# Altium PCB Altium_Sensor_CO2_Rev1.PcbDoc
Units mil, origin at the board's own origin, x right, y up, seen from the top; angles counter-clockwise.
Board outline 472.44 x 440.94 mil, 4 copper layers (Top Layer 1, MidLayer1, MidLayer2, Bottom Layer 1), stack 61.216 mil thick; 5 components, 4 nets, 25 pads, 9 vias.
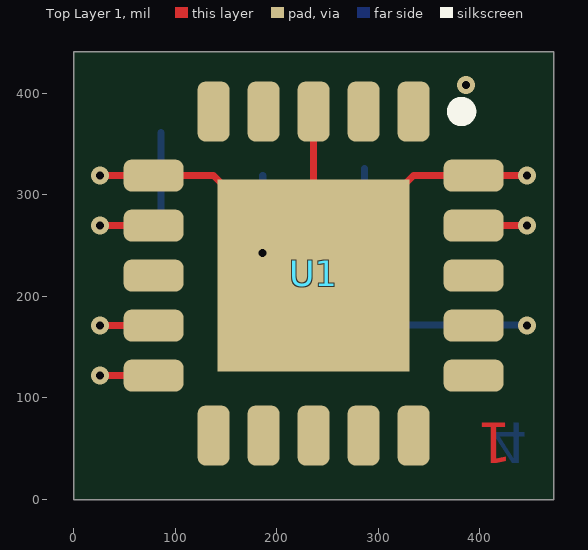
[diagram p0: Top Layer 1 view]
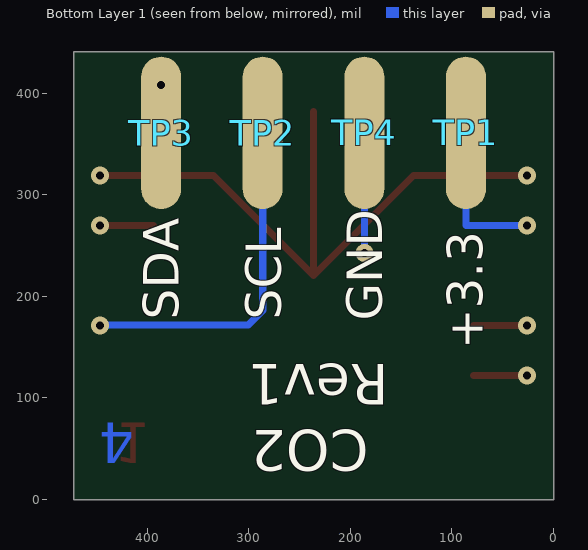
[diagram p1: Bottom Layer 1 view, seen from below]
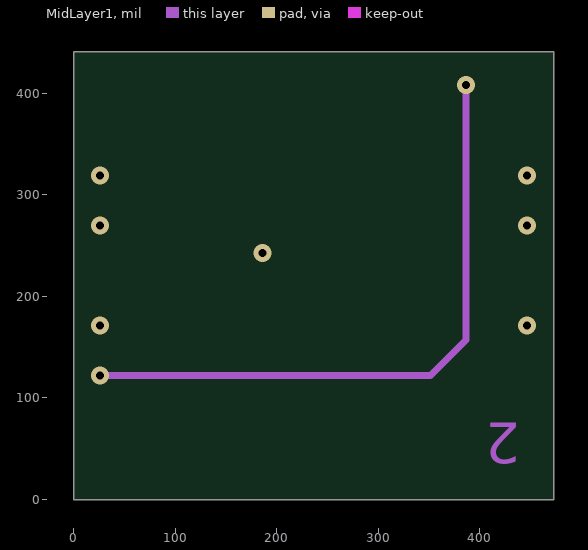
[diagram p2: MidLayer1]
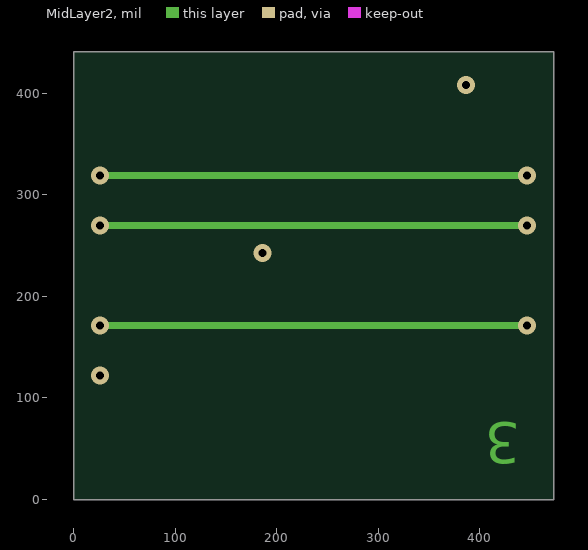
[diagram p3: MidLayer2]

## Layer stack, top to bottom
Top Solder: solder mask 0.4, Solder Resist, Dk 3.5
Top Layer 1: signal copper 1.378
Dielectric 4: prepreg 2.8, PP-006, Dk 4.1
MidLayer1: signal copper 1.4
Dielectric 1: dielectric 50.06, FR-4, Dk 4.8
MidLayer2: signal copper 1.4
Dielectric 5: prepreg 2.8, PP-006, Dk 4.1
Bottom Layer 1: signal copper 1.378
Bottom Solder: solder mask 0.4, Solder Resist, Dk 3.5

## Board outline
0,0 0,440.94 472.44,440.94 472.44,0

## Design rules (kind name [scope] priority, off if disabled: settings)
Clearance Clearance_X1 [InComponent('X1')] p1: gap=5 ignorepadtopadclearanceinfootprint=FALSE
Clearance Clearance_Q1 [InComponent('Q1')] p2: gap=7 ignorepadtopadclearanceinfootprint=FALSE
Clearance Clearance_U1 [All vs InComponent('U1')] p3: gap=7 ignorepadtopadclearanceinfootprint=FALSE
Clearance Clearance_J2 [InComponent('J2')] p4: gap=7 ignorepadtopadclearanceinfootprint=FALSE
Clearance Clearance_U2 [All vs InComponent('U2')] p5: gap=5 ignorepadtopadclearanceinfootprint=FALSE
Clearance [All] p6: gap=8 ignorepadtopadclearanceinfootprint=FALSE
HoleSize [All] p1: absolutevalues=TRUE maxlimit=200 minlimit=1 maxpercent=80.000 minpercent=20.000
MinimumSolderMaskSliver MinimumSolderMaskSliver_X1 [All vs InComponent('X1')] p1: minsoldermaskwidth=0.6
MinimumSolderMaskSliver [All] p2: minsoldermaskwidth=0.6
PlaneConnect [All] p1: planeconnectstyle=Direct reliefexpansion=20 reliefentries=4 reliefconductorwidth=10 reliefairgap=10
PolygonConnect PolygonConnect_Via [(IsVia)] p1: connectstyle=Direct reliefconductorwidth=10 reliefentries=4 polygonreliefangle="90 Angle" airgapwidth=10
PolygonConnect [All] p2: connectstyle=Relief reliefconductorwidth=10 reliefentries=4 polygonreliefangle="90 Angle" airgapwidth=10
RoutingVias [All] p1: holewidth=11.81 width=23.62 viastyle="Through Hole" minholewidth=11.81 minwidth=23.62 maxholewidth=11.81 maxwidth=23.62
SilkToSilkClearance [All] p1: silktosilkclearance=5
SilkToSolderMaskClearance [IsPad] p1: minsilkscreentomaskgap=5 clearancetoexposedcopper=TRUE
SolderMaskExpansion [All] p1: expansion=4 istentingtop=FALSE
Width [All] p1: maxlimit=40 minlimit=7 preferedwidth=7
25 further rules are at their usual default settings.

## Components (designator, comment, footprint, x,y, rotation, side; value= is the part's Value field where it differs from the comment)
TP1 "Test Point, 1mm Top Layer" TP100TL#1 3203.69,138.04 r0 bottom
TP2 "Test Point, 1mm Top Layer" TP100TL#2 2973.69,138.04 r270 bottom
TP3 "Test Point, 1mm Top Layer" TP100TL#3 2743.69,138.04 r270 bottom
TP4 "Test Point, 1mm Top Layer" TP100TL#4 3033.69,-526.96 r270 bottom
U1 "SCD40" SCD40 236.22,220.47 r270 top

## Footprints (in the part's own frame and the unit in brackets; to place one, negate y for a bottom-side part, rotate by r counter-clockwise, add the part's x,y. Pads: shape width x height; smd on the part's side, far side on the other; paste and mask are expansions set on the pad)
SCD40 [mm] "SCD40, 20-Pins"
  rrect50% 1.5x0.8 smd mask+0.076: 1(-4.1,2.5) 2(-4.1,1.25) 3(-4.1,0) 4(-4.1,-1.25) 5(-4.1,-2.5) 11(4,-2.5) 12(4,-1.25) 13(4,0) 14(4,1.25) 15(4,2.5)
  rrect50% 0.8x1.5 smd mask+0.076: 6(-2.5,-4) 7(-1.25,-4) 8(0,-4) 9(1.25,-4) 10(2.5,-4) 16(2.5,4) 17(1.25,4) 18(0,4) 19(-1.25,4) 20(-2.5,4)
  rect 4.8x4.8 smd paste-0.5 mask+0.076: 21(0,0)
  silkscreen extent -4.28,3.52 -3.92,3.88, body extent -5.05,-5.05 5.05,5.05, height 6.28
TP100TL#1 [mm] "Test Point"
  oval 1x3.81 smd paste-0.5 mask+0.076: 1(-79.184,-5.662)
TP100TL#2 [mm] "Test Point"
  oval 3.81x1 smd paste-0.5 mask+0.076: 1(-5.662,68.262)
TP100TL#3 [mm] "Test Point"
  oval 3.81x1 smd paste-0.5 mask+0.076: 1(-5.662,59.88)
TP100TL#4 [mm] "Test Point"
  oval 3.81x1 smd paste-0.5 mask+0.076: 1(-22.553,72.326)

## Part data
TP1 TP2 TP3 TP4: Manufacturer=N/A, Part_Number=N/A
U1: "CO2 SENSOR 50 PPM I2C SMD", Manufacturer=Sensirion, Part_Footprint=SCD40, Part_Number=SCD40

## Via types
v1: diameter 17.72, hole 7.87, Top Layer 1 to Bottom Layer 1, tented both sides, 9 vias

## Nets (pads, with @x,y where several pads share a name; then routed paths per layer and width w, separated by ;. In a path a pad name is that pad's centre, name@x,y a point inside that pad or via, vN(x,y) a via of type N, cw(c..) or ccw(c..) an arc to the next point about the centre after c; other vN are vias at no path point)
+3.3V: TP1.1 U1.7 U1.19 | length 676.3
  Top Layer 1 w7: v1(26.22,269.69) U1.7 ; U1.19 v1(446.22,269.69)
  MidLayer2 w7: v1(26.22,269.69) v1(446.22,269.69)
  Bottom Layer 1 w7: v1(26.22,269.69) 86.22,269.69 TP1.1
GND: TP4.1 U1.3 U1.6 U1.20 U1.21 | length 1159.2
  Top Layer 1 w7: v1(26.22,318.9) U1.6 137.8,318.9 U1.21 ; U1.3 U1.21 ; v1(446.22,318.9) U1.20 334.65,318.9 U1.21
  MidLayer2 w7: v1(26.22,318.9) v1(446.22,318.9)
  Bottom Layer 1 w7: v1@186.22,242.66 TP4.1@186.22,318.9
  other v1: 186.05,242.66
SCL: TP2.1 U1.9 | length 778.6
  Top Layer 1 w7: v1(26.22,171.26) U1.9
  MidLayer2 w7: v1(26.22,171.26) v1(446.22,171.26)
  Bottom Layer 1 w7: TP2.1@286.22,325.94 286.22,185.94 300.22,171.94 445.54,171.94 v1(446.22,171.26)
SDA: TP3.1 U1.10 | length 677.9
  Top Layer 1 w7: v1(26.22,122.05) U1.10
  MidLayer1 w7: v1(26.22,122.05) 351.22,122.05 386.22,157.05 v1(386.22,407.94)
pads on no net: U1.1 U1.2 U1.4 U1.5 U1.8 U1.11 U1.12 U1.13 U1.14 U1.15 U1.16 U1.17 U1.18

## Other copper
Top Layer 1:
  text "1" at 431.78,75.31 h40 r180
MidLayer1:
  text "2" at 439.78,75.31 h40 r180
MidLayer2:
  text "3" at 439.78,75.31 h40 r180
Bottom Layer 1:
  text "4" at 412.78,75.31 h40 r180

## Silkscreen, mask and mechanical layers (free items; w line width, h text height)
Bottom Overlay:
  text "SCL" at 268,177 h35 r270
  text "SDA" at 369,177 h35 r270
  text "GND" at 168.44,176 h35 r270
  text "+3.3" at 69.44,148 h35 r270
  text "Rev1" at 162,133 h40 r180
  text "CO2" at 182,68.31 h40 r180
Mechanical 1:
  the board outline again, w10